# Altium PCB GymkhanaStoper v1.6.PcbDoc
Units mm, origin at the board's own origin, x right, y up, seen from the top; angles counter-clockwise.
Board outline 60 x 39 mm, 2 copper layers (Top Layer, Bottom Layer); 10 components, 11 nets, 38 pads, 0 vias.
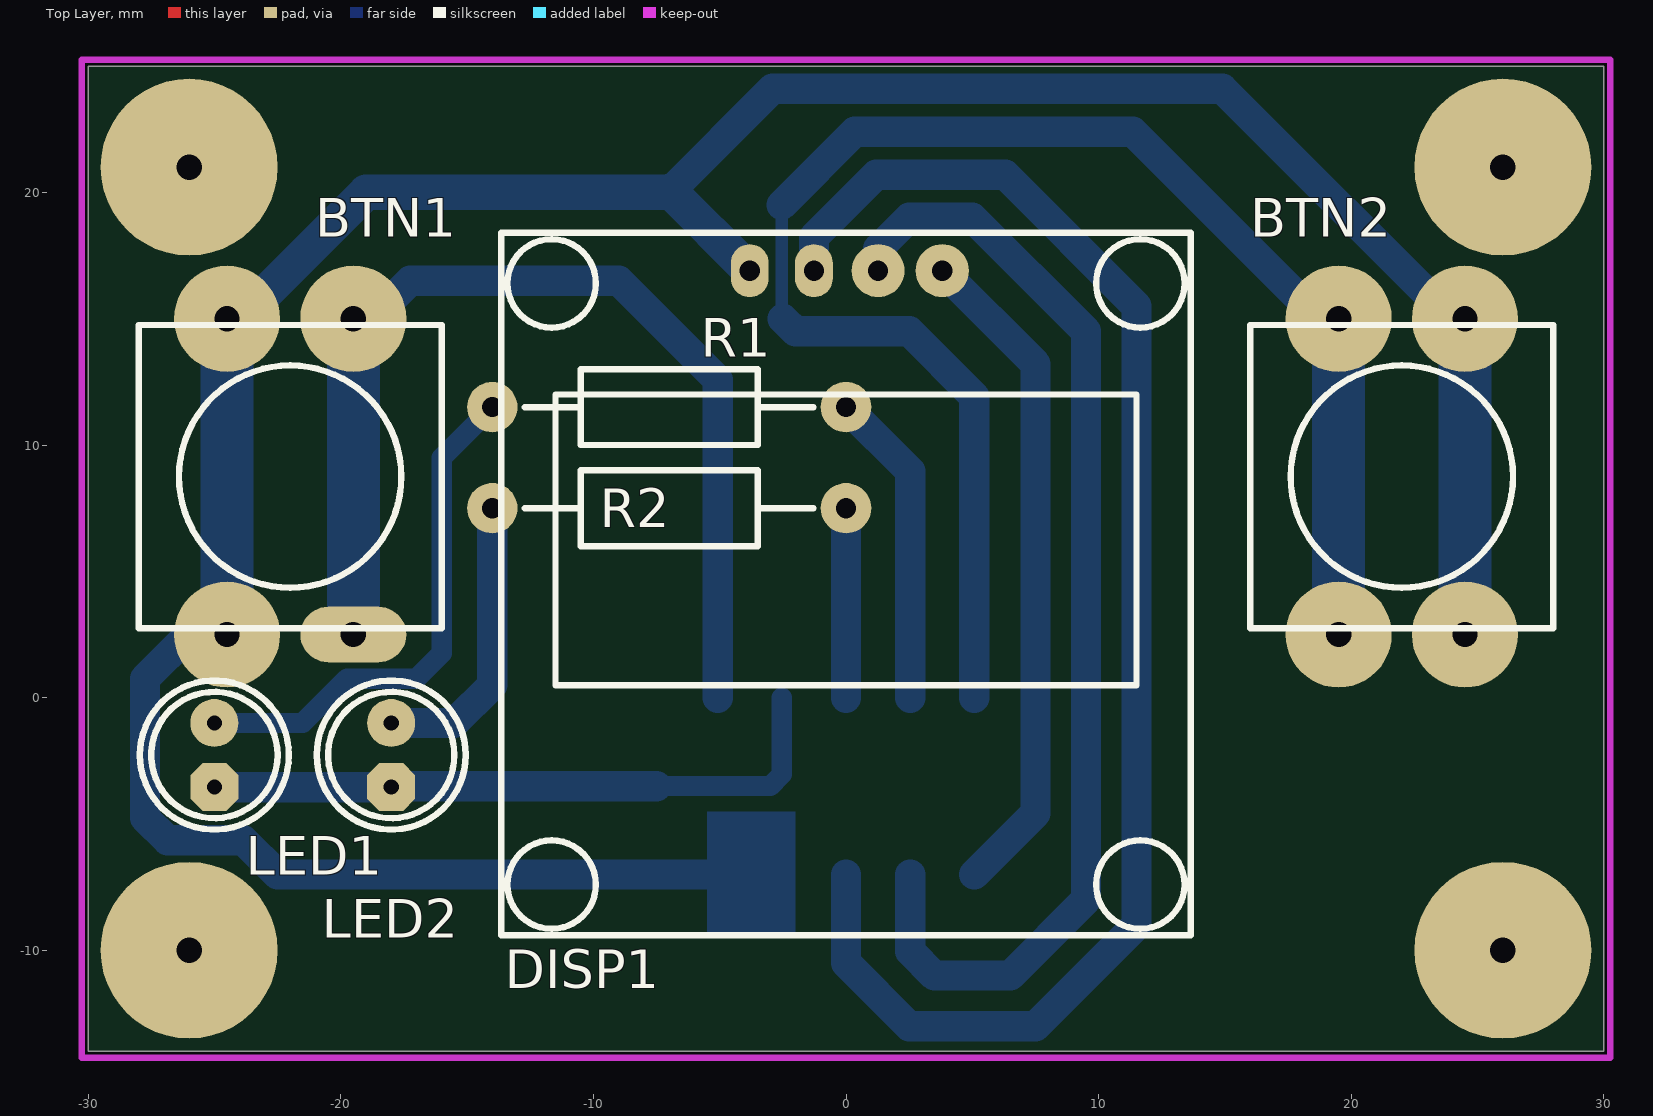
[diagram p0: Top Layer view]
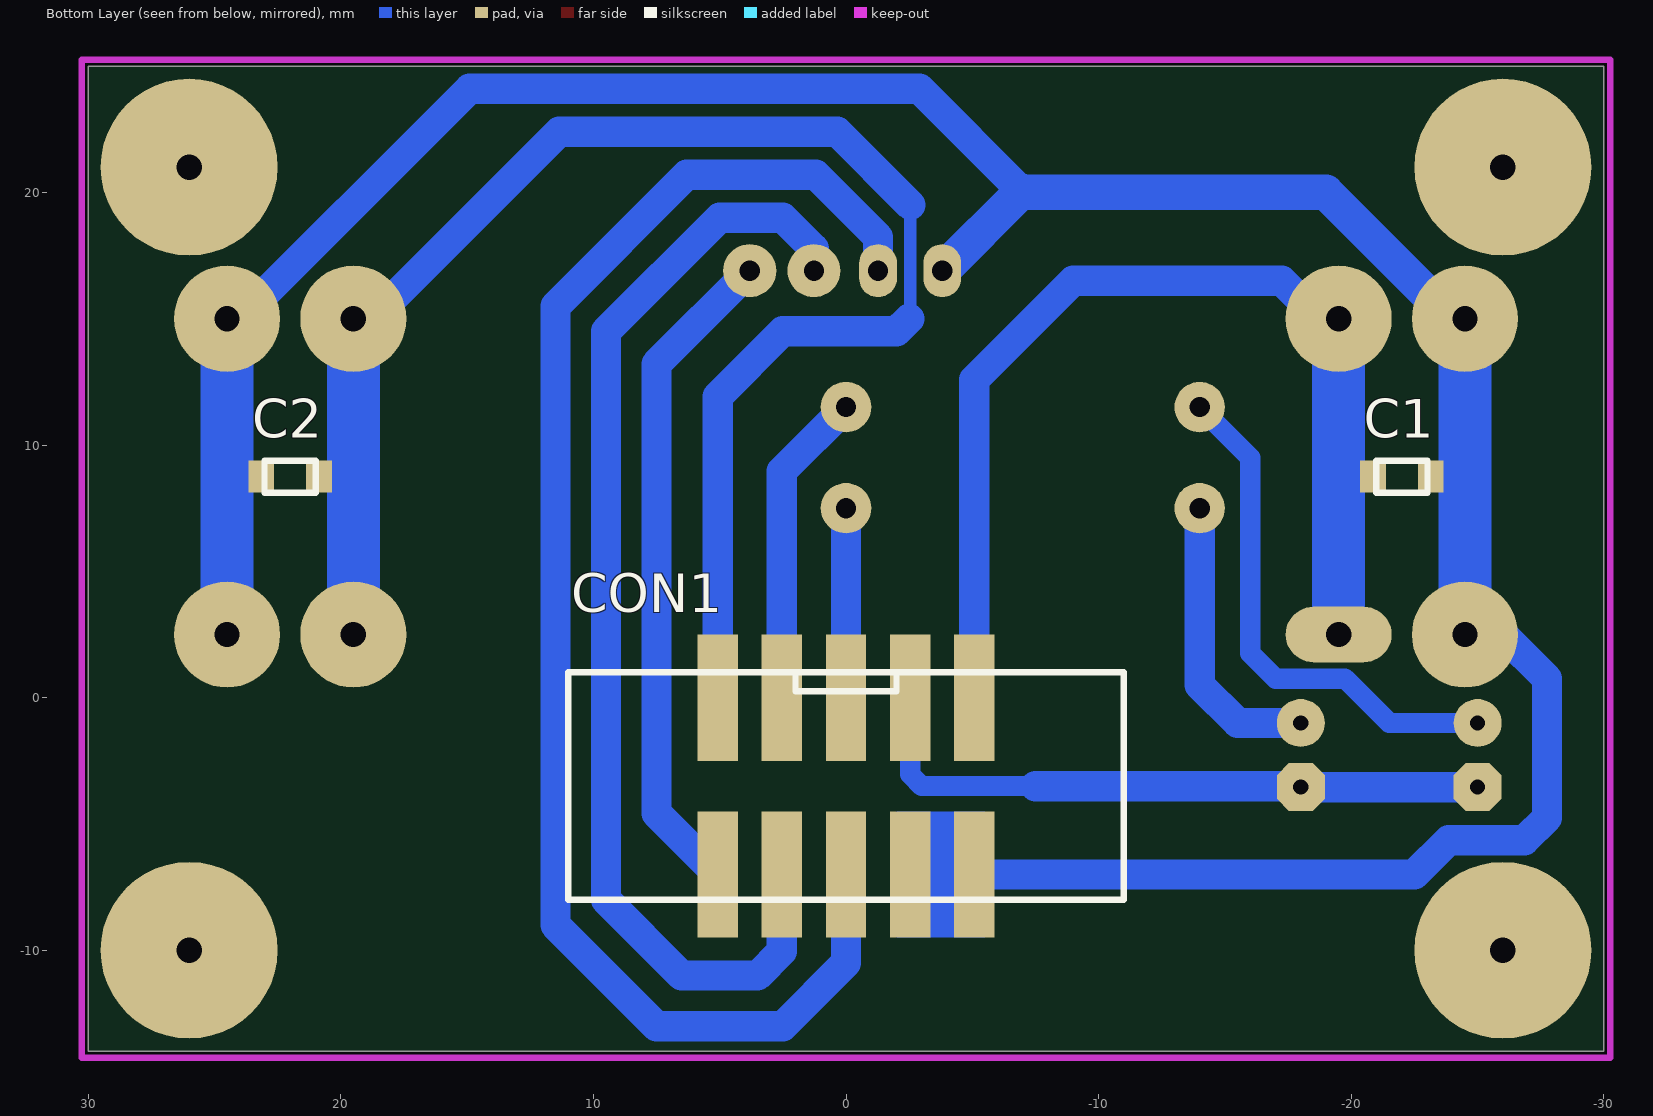
[diagram p1: Bottom Layer view, seen from below]
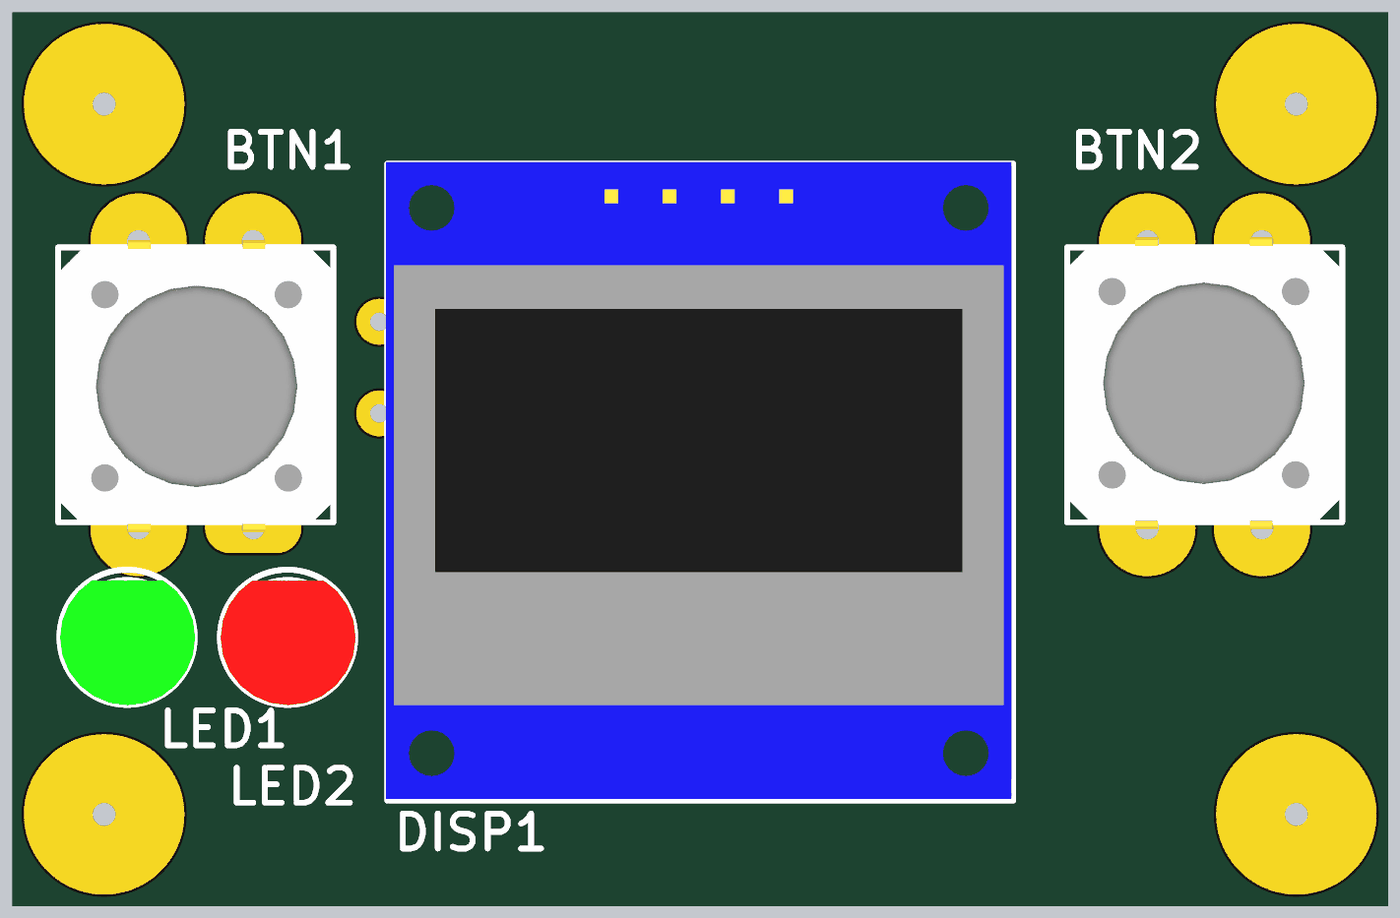
[diagram p2: 3D render of the assembled board from above, using the file's embedded part models]
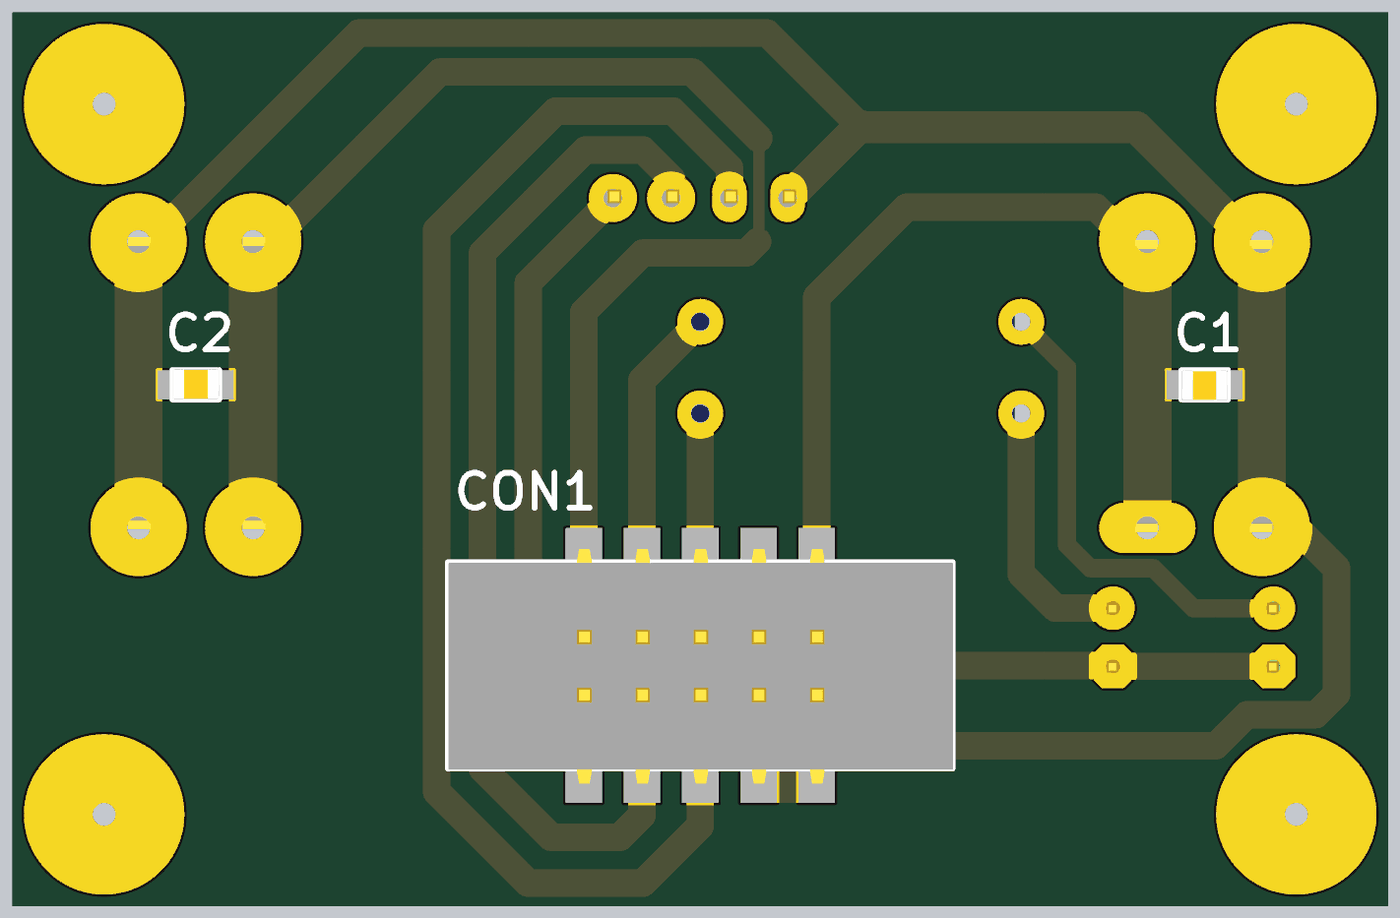
[diagram p3: 3D render of the assembled board from below, using the file's embedded part models]

## Layer stack, top to bottom
Top Solder: solder mask 0.0102, Solder Resist, Dk 3.5
Top Layer: signal copper 0.0356
Dielectric 1: dielectric 0.32, FR-4, Dk 4.8
Bottom Layer: signal copper 0.0356
Bottom Solder: solder mask 0.0102, Solder Resist, Dk 3.5

## Board outline
-30,-14 30,-14 30,25 -30,25

## Design rules (kind name [scope] priority, off if disabled: settings)
Clearance [All] p1: gap=0.254 ignorepadtopadclearanceinfootprint=FALSE except(0: Arc-Hole Track-Hole SMDPad-Hole THPad-Hole Via-Hole Fill-Hole Poly-Hole Region-Hole Text-Hole)
PolygonConnect [All] p1: connectstyle=Relief reliefconductorwidth=0.254 reliefentries=4 polygonreliefangle="90 Angle" airgapwidth=0.254
RoutingLayers [All] p1: top layer_v5=FALSE bottom layer_v5=TRUE
RoutingVias [All] p1: holewidth=0.711 width=1.27 viastyle="Through Hole" minholewidth=0.711 minwidth=1.27 maxholewidth=0.711 maxwidth=1.27
SolderMaskExpansion [All] p1: expansion=0.102
Width [All] p1: maxlimit=2.1 minlimit=0.5 preferedwidth=1.2
29 further rules are at their usual default settings.

## Classes and differential pairs
component class "GymkhanaStoper v1.6": BTN1 BTN2 C1 C2 CON1 LED1 LED2 R1 R2

## Components (designator, comment, footprint, x,y, rotation, side; value= is the part's Value field where it differs from the comment)
BTN1 "*" TACT12x12#1 -22,8.75 r270 top
BTN2 "*" TACT12x12#2 22,8.75 r90 top
C1 "kondensator" 0805-C -22,8.75 r0 bottom
C2 "kondensator" 0805-C 22,8.75 r180 bottom
CON1 "*" IDC10_2.54mm_SMT 0,-3.5 r0 bottom
DISP1 "*" "SD1306-128x64 nohole" 0,4.5 r0 top
LED1 "*" LED5mm_plaska_GREEN -25,-3.54 r90 top
LED2 "*" LED5mm_plaska_RED -18,-3.54 r90 top
R1 "rezystor" 6.5x2.5x14 -7,11.5 r180 top
R2 "rezystor" 6.5x2.5x14 -7,7.5 r180 top

## Footprints (in the part's own frame and the unit in brackets; to place one, negate y for a bottom-side part, rotate by r counter-clockwise, add the part's x,y. Pads: shape width x height; smd on the part's side, far side on the other; paste and mask are expansions set on the pad)
6.5x2.5x14 [mm]
  round 2 hole 0.8: 1(-7,0) 2(7,0)
  silkscreen extent -5.72,-1.5 5.71,1.5
0805-C [mil] "kondensator"
  rect 40x50 smd: 1(-45,0) 2(45,0)
  silkscreen extent -40,-25 40,25, body extent -40,-25 40,27, height 26
IDC10_2.54mm_SMT [mm] "T821M110A1S100CEU"
  rect 1.6x5 smd: 1(-5.08,-3.5) 2(-5.08,3.5) 3(-2.54,-3.5) 4(-2.54,3.5) 5(0,-3.5) 6(0,3.5) 7(2.54,-3.5) 8(2.54,3.5) 9(5.08,-3.5) 10(5.08,3.5)
  silkscreen extent -11,-4.5 11,4.5, body extent -11.03,-5.09 10.97,5.15, height 10.13
LED5mm_plaska_GREEN [mm] "L-483GDT"
  oct 1.9x1.9 hole 0.6: 1(0,0)
  round 1.9 hole 0.6: 2(2.54,0)
  silkscreen extent -1.68,-2.95 4.22,2.95, body extent -1.7,-2.98 3.75,2.93, height 9.61
LED5mm_plaska_RED [mm] "L-483IDT"
  oct 1.9x1.9 hole 0.6: 1(0,0)
  round 1.9 hole 0.6: 2(2.54,0)
  silkscreen extent -1.68,-2.95 4.22,2.95, body extent -1.7,-2.98 3.75,2.93, height 9.61
"SD1306-128x64 nohole" [mm]
  oval 1.5x2.1 hole 0.8: 1(-3.81,12.4) 2(-1.27,12.4)
  round 2.1 hole 0.8: 3(1.27,12.4) 4(3.81,12.4)
  silkscreen extent -13.65,-13.9 13.65,13.9, body extent -13.72,-13.83 13.58,13.97, height 5.45
TACT12x12#1 [mm] "12 x 12 mm"
  round 4.2 hole 1: 1(-6.25,2.5) 3(-6.25,-2.5) 4(6.25,-2.5)
  oval 2.2x4.2 hole 1: 2(6.25,2.5)
  silkscreen extent -6,-6 6,6, body extent -6.31,-5.97 6.44,6.03, height 15.7
TACT12x12#2 [mm] "12 x 12 mm"
  round 4.2 hole 1: 1(-6.25,2.5) 2(6.25,2.5) 3(-6.25,-2.5) 4(6.25,-2.5)
  silkscreen extent -6,-6 6,6, body extent -6.31,-5.97 6.44,6.03, height 15.7

## Part data
BTN1 BTN2: library part TACT12x12
C1 C2: library part C, Napi阠ie=100V, Pojemno滄=100nF
CON1: library part IDC10_2.54mm
DISP1: library part SD1306_128x64, "SD1306_128x64"
LED1: library part Led5mm_green, "Led zielona"
LED2: library part Led5mm_red, "Led czerwona"
R1 R2: library part R, Moc="1/2 W", Rezystancja=100R

## Free pads (board coordinates)
  round 7 hole 1: 0(-26,-10) 0(-26,21) 0(26,-10) 0(26,21)

## Nets (pads, with @x,y where several pads share a name; then routed paths per layer and width w, separated by ;. In a path a pad name is that pad's centre, name@x,y a point inside that pad or via, vN(x,y) a via of type N, cw(c..) or ccw(c..) an arc to the next point about the centre after c; other vN are vias at no path point)
5V: CON1.3 LED1.1 LED2.1 | length 25.7
  Bottom Layer w0.8: -7.5,-3.5 -3,-3.5 -2.54,-3.04 CON1.3
  Bottom Layer w1.2: LED1.1 LED2.1 -17.96,-3.5 -7.5,-3.5
GND: BTN1.3 BTN1.4 BTN2.3 BTN2.4 C1.1 C2.1 CON1.2 CON1.4 DISP1.1 | length 120
  Bottom Layer w1.2: BTN1.4 -26,2.5 -27.75,0.75 -27.75,-4.75 -26.854,-5.646 -23.854,-5.646 -22.5,-7 CON1.2 ; BTN1.3 BTN1.3@-24.5,15.25 ; -6.96,20.05 -2.91,24.1 14.9,24.1 24.5,14.5 BTN2.4@24.5,14.25
  Bottom Layer w1.4: BTN1.3@-24.5,14.5 -19,20 -6.91,20 ; -6.96,20.05 DISP1.1
  Bottom Layer w2.1: BTN1.4 -24.5,14.5 BTN1.3 ; BTN2.3@24.5,1.75 BTN2.4@24.5,14.25
NetBTN1_1: BTN1.1 BTN1.2 C1.2 CON1.1 | length 42.1
  Bottom Layer w1.2: BTN1.1@-19.5,14.25 -17.25,16.5 -9,16.5 -5.08,12.58 CON1.1
  Bottom Layer w2.1: BTN1.2 BTN1.1
NetBTN2_1: BTN2.1 BTN2.2 C2.2 CON1.9 | length 64.4
  Bottom Layer w0.5: -2.55,15 -2.55,19.5
  Bottom Layer w1.2: -2.55,19.5 0.35,22.4 11.35,22.4 BTN2.2@19.5,14.25 ; -2.5,15 -2,14.5 2.5,14.5 5.08,11.92 CON1.9
  Bottom Layer w2.1: BTN2.1@19.5,1.75 BTN2.2@19.5,14.25
NetCON1_5: CON1.5 R2.1 | length 7.5
  Bottom Layer w1.2: CON1.5 R2.1
NetCON1_6: CON1.6 DISP1.2 | length 59.5
  Bottom Layer w1.2: DISP1.2 -1.27,18.23 1.2,20.7 6.3,20.7 11.5,15.5 11.5,-9 7.5,-13 2.5,-13 0,-10.5 CON1.6
NetCON1_7: CON1.7 R1.1 | length 12.6
  Bottom Layer w1.2: R1.1 2.54,8.96 CON1.7
NetCON1_8: CON1.8 DISP1.3 | length 45.6
  Bottom Layer w1.2: DISP1.3 1.27,17.77 2.5,19 5,19 9.5,14.5 9.5,-8 6.5,-11 3.5,-11 2.54,-10.04 CON1.8
NetCON1_10: CON1.10 DISP1.4 | length 26.6
  Bottom Layer w0.254: DISP1.4 DISP1.4@3.936,17.026
  Bottom Layer w1.2: DISP1.4 7.5,13.21 7.5,-4.58 CON1.10
NetLED1_2: LED1.2 R1.2 | length 20.7
  Bottom Layer w0.8: LED1.2 -21.5,-1 -19.754,0.746 -17.004,0.746 -16,1.75 -16,9.5 R1.2
NetLED2_2: LED2.2 R2.2 | length 11.6
  Bottom Layer w1.2: LED2.2 -15.5,-1 -14,0.5 R2.2

## Keep-outs
Keep-Out Layer:
  lines w0.254: -30.25,-14.25 30.25,-14.25 30.25,25.25 -30.25,25.25 -30.25,-14.25

## Other copper
Bottom Layer:
  rectangle net GND: -5.5,-9.5 -2,-4.5